# Altium PCB PCB1.PcbDoc
Units mil, origin at the board's own origin, x right, y up, seen from the top; angles counter-clockwise.
Board outline 4637 x 3446 mil, 2 copper layers (Top Layer, Bottom Layer), stack 23.712 mil thick; 43 components, 32 nets, 134 pads, 0 vias.
Unrouted connection lines stored in the file: 9.
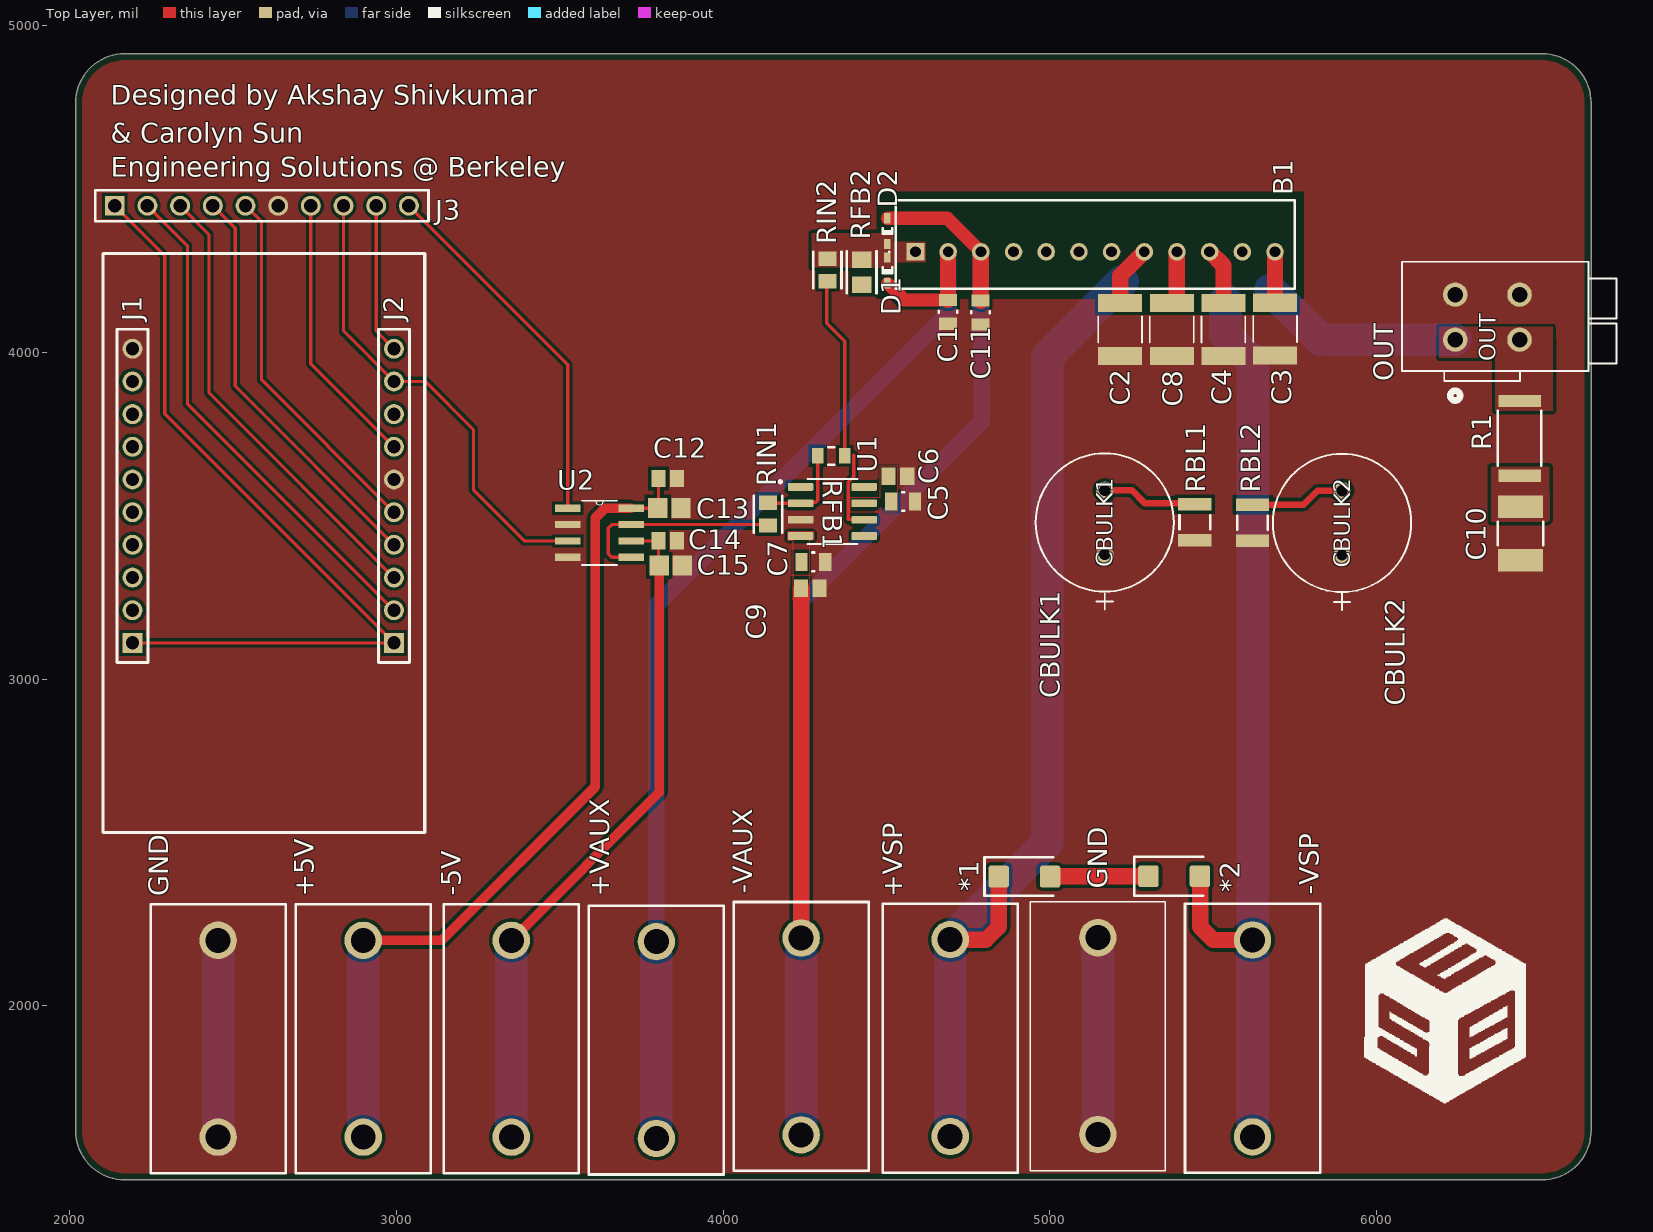
[diagram p0: Top Layer view]
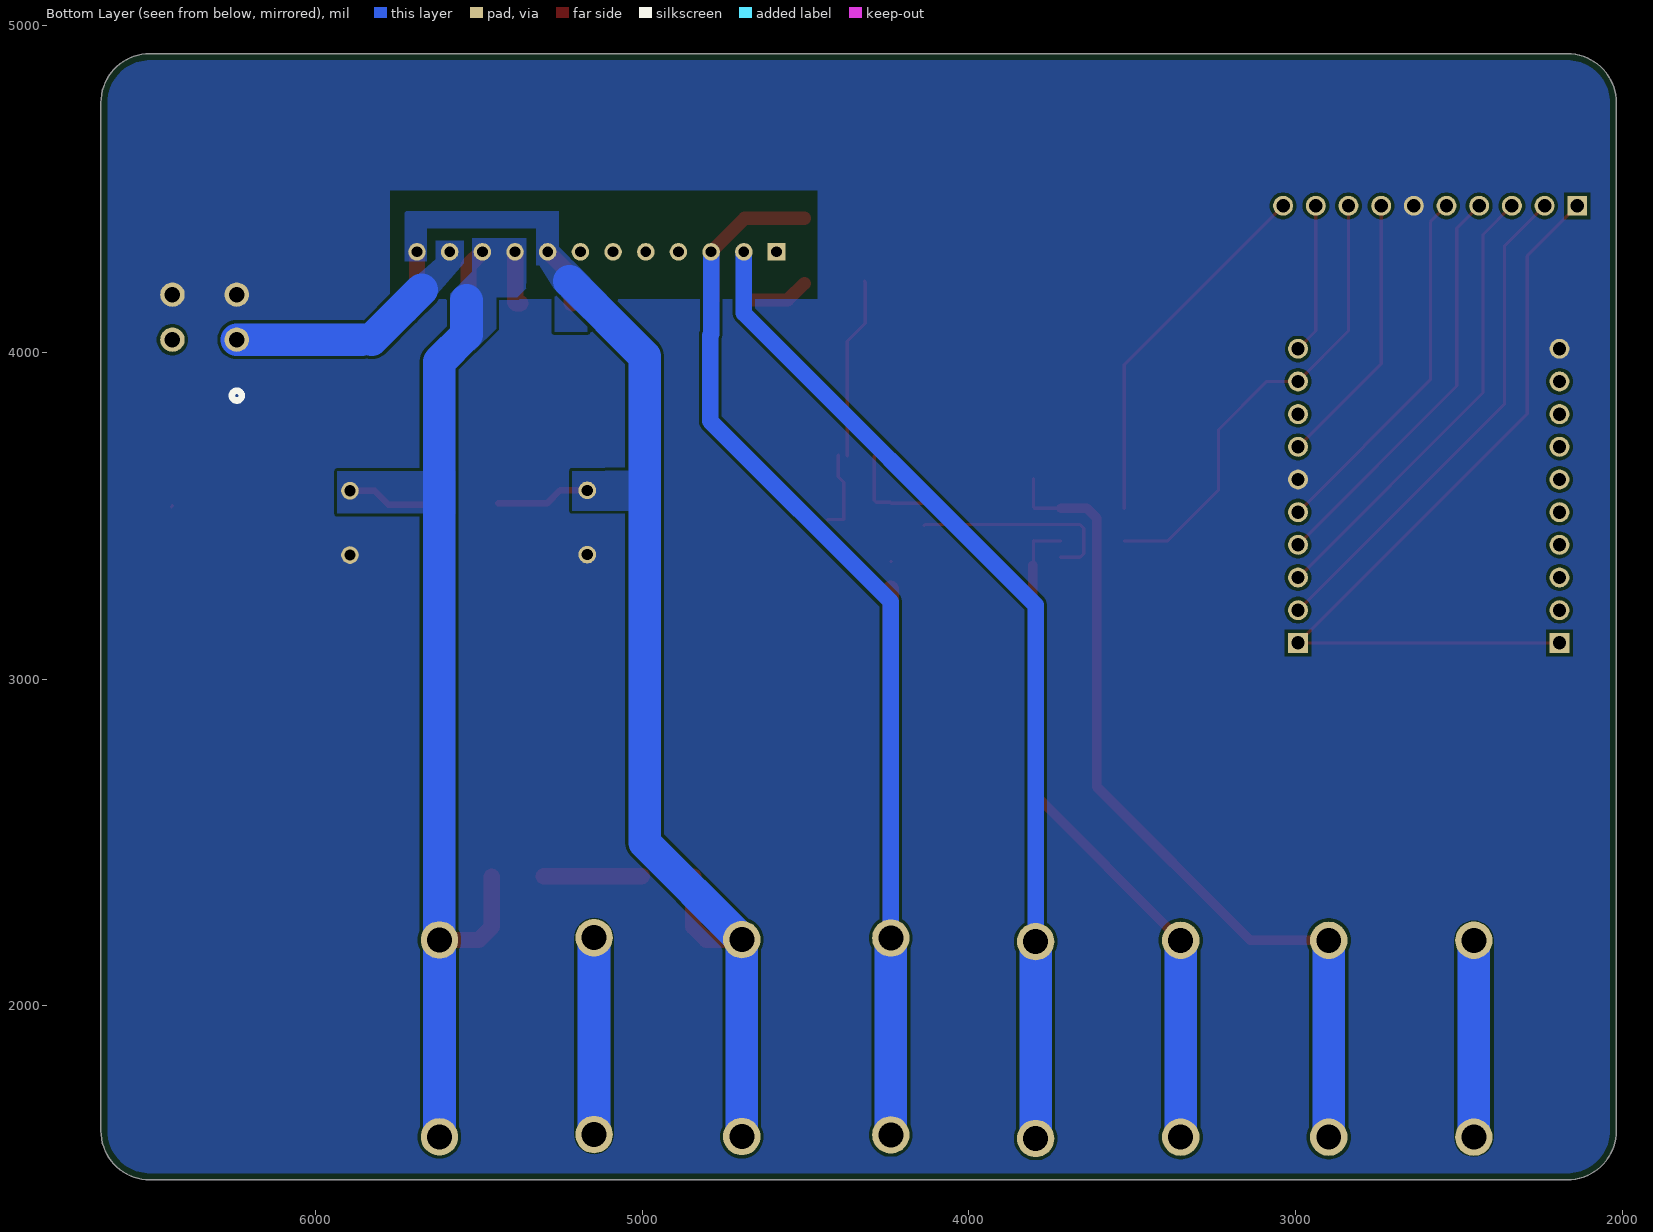
[diagram p1: Bottom Layer view, seen from below]
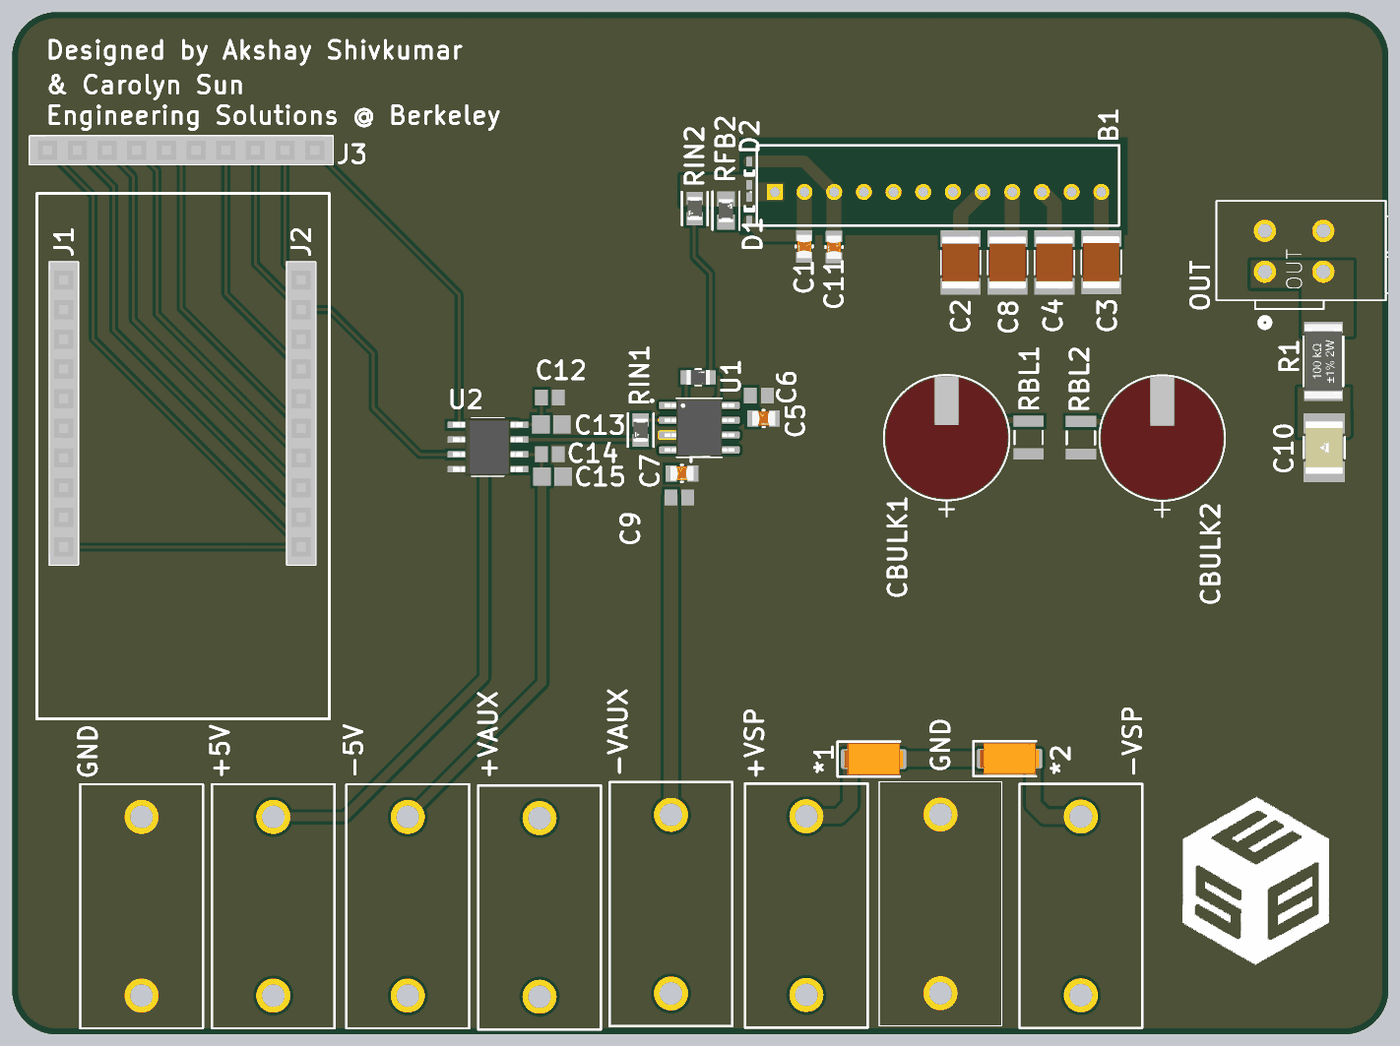
[diagram p2: 3D render of the assembled board from above, using the file's embedded part models]

## Layer stack, top to bottom
Top Solder: solder mask 0.4, Solder Resist, Dk 3.5
Top Layer: signal copper 2.756
Dielectric 2: prepreg 2.8, PP-006, Dk 4.1
Dielectric 1: dielectric 12.6, FR-4, Dk 4.8
Dielectric 3: prepreg 2.8, PP-006, Dk 4.1
Bottom Layer: signal copper 2.756
Bottom Solder: solder mask 0.4, Solder Resist, Dk 3.5

## Board outline
2019,1618 2019,4764 cw(c2169,4764) 2169,4914 6506,4914 cw(c6506,4764) 6656,4764 6656,1618 cw(c6506,1618) 6506,1468 2169,1468 cw(c2169,1618)

## Design rules (kind name [scope] priority, off if disabled: settings)
BoardOutlineClearance [All] p1: gap=20 ignorepadtopadclearanceinfootprint=FALSE
Clearance [All] p1: gap=10 ignorepadtopadclearanceinfootprint=TRUE except(20: Arc-Hole Track-Hole SMDPad-THPad SMDPad-Hole THPad-THPad THPad-Hole Via-Hole Fill-Hole Poly-Hole Region-Hole Text-Hole)
ComponentClearance [All] p1: gap=5 collisioncheckmode=3 verticalgap=5 showdistances=TRUE
Height [All] p1: minheight=0 maxheight=71497.94 prefheight=500
HoleSize HoleSize_Via [IsVia] p1: absolutevalues=TRUE maxlimit=60 minlimit=12 maxpercent=80.000 minpercent=20.000
HoleSize HoleSize_Pad [IsPad] p2: absolutevalues=TRUE maxlimit=200 minlimit=20 maxpercent=80.000 minpercent=20.000
HoleToHoleClearance [All] p1: gap=20 allowstackedmicrovias=TRUE
MinimumAnnularRing [All] p1: minimumring=6
PlaneConnect [All] p1: planeconnectstyle=Direct reliefexpansion=20 reliefentries=4 reliefconductorwidth=10 reliefairgap=10
PolygonConnect PolygonConnect_GND [All vs InNet('GND')] p1: connectstyle=Direct reliefconductorwidth=10 reliefentries=4 polygonreliefangle="90 Angle" airgapwidth=10
PolygonConnect [All] p2: connectstyle=Direct reliefconductorwidth=20 reliefentries=4 polygonreliefangle="90 Angle" airgapwidth=20
RoutingVias [All] p1: holewidth=14 width=28 viastyle="Through Hole" minholewidth=14 minwidth=28 maxholewidth=28 maxwidth=50
SilkToSilkClearance [All] p1: silktosilkclearance=6
SilkToSolderMaskClearance [IsPad] p1: minsilkscreentomaskgap=6 clearancetoexposedcopper=TRUE
SolderMaskExpansion [IsVia] p1: expansion=4 istentingtop=TRUE
SupplyNets "Schematic Supply Nets_6" [InNet('+15V')] p1: voltage=0.000
SupplyNets "Schematic Supply Nets_5" [InNet('+5V')] p2: voltage=0.000
SupplyNets "Schematic Supply Nets_4" [InNet('-15V')] p3: voltage=0.000
SupplyNets "Schematic Supply Nets_3" [InNet('-5V')] p4: voltage=0.000
SupplyNets "Schematic Supply Nets" [InNet('GND')] p5: voltage=0.000
UnRoutedNet [All] p1: checkbadconnections=TRUE
Width [All] p1: maxlimit=100 minlimit=6 preferedwidth=10 minimp=50.000000 maximp=50.000000 favimp=50.000000
Width Width_HV [All] p2: maxlimit=100 minlimit=20 preferedwidth=35 minimp=50.000000 maximp=50.000000 favimp=50.000000
22 further rules are at their usual default settings.

## Components (designator, comment, footprint, x,y, rotation, side; value= is the part's Value field where it differs from the comment)
*1 "US1M" DO-214AC_SMA 4922,2396 r0 top value=Diode
*2 "US1M" DO-214AC_SMA 5380,2397 r0 top value=Diode
+5V "571-0100" 571-0100 2899,1886 r270 top
+VAUX "571-0100" 571-0100 3796,1882.04 r270 top
+VSP "571-0100" 571-0100 4695,1888.04 r270 top
-5V "571-0100" 571-0100 3352,1886 r270 top
-VAUX "571-0100" 571-0100 4239,1893.04 r270 top
-VSP "571-0100" 571-0100 5620,1887.04 r270 top
B1 "PA107DP" PA107DP 4588.82,4307.78 r0 top
C1 "1uF" FP-CC0805-0_85-MFG 4688,4124 r270 top value="1 uF"
C2 "1uF" CAPC4532X279N 5215,4070 r90 top
C3 "1uF" CAPC4532X279N 5689,4071 r90 top
C4 "1uF" CAPC4532X279N 5531,4070 r90 top
C5 "2.2uF" FP-CC0805-0_85-MFG 4551,3544 r0 top value="2.2 uF"
C6 "10nF" CAPC2013X145X48LL20T23 4535,3621 r180 top
C7 "2.2uF" FP-CC0805-0_85-MFG 4276,3359 r0 top value="2.2 uF"
C8 "1uF" CAPC4532X279N 5373,4070 r90 top
C9 "10nF" CAPC2013X145X48LL20T23 4266.72,3277.66 r180 top
C10 "2.2nF" FP-HV1812-IPC_A 6440,3446 r270 top
C11 "1uF" FP-CC0805-0_85-MFG 4788,4122 r270 top value="1 uF"
C12 "100nF" CAPC2013X145X48LL20T23 3831,3614 r180 top
C13 "10uF" CAPC2013X140X50ML20T25 3836,3524 r180 top
C14 "100nF" CAPC2013X145X48LL20T23 3831,3424 r180 top
C15 "10uF" CAPC2013X140X50ML20T25 3840,3348 r180 top
CBULK1 "22uF" CAP_BX_10x16_RUB 5167.88,3381 r90 top
CBULK2 "22uF" CAP_BX_10x16_RUB 5894,3379.76 r90 top
D1 "1N4148WT" FAIR-SOD-523F-2_V 4503,4250.63 r90 top
D2 "1N4148WT" FAIR-SOD-523F-2_V 4503,4371 r90 top
GND "571-0100" 571-0100 2455,1886.04 r270 top (schematic designator GND2)
GND "571-0100" 5710100 5147,2209 r270 top (schematic designator GND1)
J1 "SSW-110-03-G-S" SMTC-SSW-110-03-X-S 2193,3111 r90 top
J2 "SSW-110-03-G-S" SMTC-SSW-110-03-X-S 2993,3111 r90 top
J3 "SSW-110-03-G-S" SMTC-SSW-110-03-X-S 2138.67,4448.51 r0 top
OUT "2601-1102" CONN2_2601-1102_WAG 6240.15,4039 r90 top
R1 "22R" FP-CRGP2512-IPC_C 6437,3737 r90 top value=22Ω
RBL1 "47k" RESC1210(3225)_L 5443.88,3480 r90 top value="47000.00 Ohm"
RBL2 "47k" RESC1210(3225)_L 5620,3478.88 r90 top value="47000.00 Ohm"
RFB1 "10k" FP-SR0805-MFG 4331,3683 r0 top value=10KΩ
RFB2 "20k" FP-CRCW0805-HPe3-IPC_A 4424,4245 r270 top
RIN1 "1k" FP-CRCW0805-HPe3-IPC_B 4137,3505 r90 top
RIN2 "1k" FP-CRCW0805-HPe3-IPC_B 4319,4252 r90 top
U1 "LM7171AIM" SOIC127P599X175-8N 4334.43,3513.2 r0 top
U2 "AD603ARZ-REEL-REEL7" SOIC127P600X175-8N 3622,3448 r0 top

## Footprints (in the part's own frame and the unit in brackets; to place one, negate y for a bottom-side part, rotate by r counter-clockwise, add the part's x,y. Pads: shape width x height; smd on the part's side, far side on the other; paste and mask are expansions set on the pad)
571-0100 [mm]
  round 2.91 hole 1.94: 1(-8,0) 2(7.3,0)
  silkscreen extent -10.8,-5.25 10.1,5.25
5710100 [mm]
  round 2.91 hole 1.94: 1(0,0) 2(15.3,0)
  silkscreen extent -2.8,-5.25 18.1,5.25
CAP_BX_10x16_RUB [mil]
  round 54 hole 34 paste-99999 mask+0: 1(0,0) 2(196.85,0)
  silkscreen extent -168,-212 310,212, body extent -108,-206 306,206, height 710
CAPC2013X140X50ML20T25 [mm] "Chip Capacitor, 2-Leads, Body 2.00x1.25mm, IPC Low Density"
  rect 1.5x1.55 smd: 1(-0.9,0) 2(0.9,0)
  body extent -1.1,-0.72 1.1,0.72, height 1.4
CAPC2013X145X48LL20T23 [mm] "Chip Capacitor, 2-Leads, Body 2.00x1.25mm, IPC High Density"
  rect 1.1x1.35 smd: 1(-0.725,0) 2(0.725,0)
  body extent -1.1,-0.72 1.1,0.72, height 1.45
CAPC4532X279N [mm]
  rect 1.41x3.42 smd: 1(-2.049,0) 2(2.049,0)
  silkscreen extent -1.02,-1.7 1.02,1.7, body extent -2.25,-1.6 2.25,1.6, height 2.79
CONN2_2601-1102_WAG [mm]
  round 1.9 hole 1.2 paste-2539.97 mask+0: 1(0,0) 2(0,-5) 3(3.5,0) 4(3.5,-5)
  silkscreen extent -4.74,-12.52 6.05,4.15
DO-214AC_SMA [mm]
  rrect25% 1.6x1.7 smd: 1(-2,0) 2(2,0)
  silkscreen extent -3.1,-1.5 2.25,1.5, body extent -2.53,-1.35 2.52,1.35, height 2.17
FAIR-SOD-523F-2_V [mm] "SMD, 2-Leads, Body 1.2x0.8mm, Height 0.7mm"
  rect 0.8x0.5 smd: 1(-1,0) 2(1,0)
  silkscreen extent -0.2,-0.38 0.24,0.38, body extent -0.6,-0.4 0.6,0.4, height 0.71
FP-CC0805-0_85-MFG [mm]
  rect 0.95x1.4 smd paste+0 mask+0: 1(-0.925,0) 2(0.925,0)
  silkscreen extent -0.08,-0.72 0.07,0.72, body extent -1.6,-1.05 1.6,1.05, height 0.25
FP-CRCW0805-HPe3-IPC_A [mil]
  rect 51.42x59.38 smd paste+0 mask+0: 1(-38.43,0) 2(38.43,0)
  silkscreen extent -64,-45 64,45, body extent -84,-49 84,49, height 10
FP-CRCW0805-HPe3-IPC_B [mil]
  rect 43.55x55.44 smd paste+0 mask+0: 1(-34.49,0) 2(34.49,0)
  silkscreen extent -56,-43 56,43, body extent -66,-38 66,38, height 10
FP-CRGP2512-IPC_C [mil]
  rect 37.72x130.17 smd paste+0 mask+0: 1(-114.25,0) 2(114.25,0)
  silkscreen extent -84,-67 84,67, body extent -137,-71 137,71, height 10
FP-HV1812-IPC_A [mil]
  rect 69.02x138.04 smd paste+0 mask+0: 1(-81.71,0) 2(81.71,0)
  silkscreen extent -35,-69 35,69, body extent -136,-89 136,89, height 10
FP-SR0805-MFG [mm]
  rect 0.9x1.2 smd paste+0 mask+0: 1(-1.05,0) 2(1.05,0)
  silkscreen extent -0.23,-0.67 0.23,0.67, body extent -1.6,-0.77 1.6,0.77, height 0.25
PA107DP [mm]
  rect 1.365x1.365 hole 0.84: 1(0,0)
  round 1.365 hole 0.84: 2(2.54,0) 3(5.08,0) 4(7.62,0) 5(10.16,0) 6(12.7,0) 7(15.24,0) 8(17.78,0) 9(20.32,0) 10(22.86,0) 11(25.4,0) 12(27.94,0)
  silkscreen extent -2.1,-2.87 29.47,3.99
RESC1210(3225)_L [mm] "Chip Resistor, Body 3.2x2.5mm, IPC High Density"
  rect 0.95x2.6 smd: 1(-1.4,0) 2(1.4,0)
  silkscreen extent -0.55,-1.2 0.55,1.2, body extent -1.7,-1.35 1.7,1.35, height 0.71
SMTC-SSW-110-03-X-S [mm] "SQ Post Socket, 1x10 Pins, Vertical, 2.54mm Pitch, Female"
  rect 1.55x1.55 hole 1.04: 1(0,0)
  round 1.55 hole 1.04: 2(2.54,0) 3(5.08,0) 4(7.62,0) 5(10.16,0) 6(12.7,0) 7(15.24,0) 8(17.78,0) 9(20.32,0) 10(22.86,0)
  silkscreen extent -1.52,-1.21 24.39,1.2, body extent -1.52,-1.21 24.38,1.21, height 8.51
SOIC127P599X175-8N [mm]
  rrect25% 1.97x0.6 smd paste+0 mask+0.102: 1(-2.47,1.905) 2(-2.47,0.635) 3(-2.47,-0.635) 4(-2.47,-1.905) 5(2.47,-1.905) 6(2.47,-0.635) 7(2.47,0.635) 8(2.47,1.905)
  silkscreen extent -4.14,-2.53 1.95,2.52, body extent -3,-2.45 3,2.45, height 1.75
SOIC127P600X175-8N [mil]
  rect 78x22 smd: 1(-97,75) 2(-97,25) 3(-97,-25) 4(-97,-75) 5(97,-75) 6(97,-25) 7(97,25) 8(97,75)
  silkscreen extent -54,-98 54,98, body extent -118,-96 118,96, height 69

## Part data
*1 *2: library part CMP-307-000068-2, "Diode 1000 V 1A Surface Mount DO-214AC (SMA)", Component Type=Standard, Datasheet=https://diotec.com/de/produktliste/D.html, Description_=Diode, Design Item ID=Diode, ki_keywords=Diode, Pin Count=2, Reference=D, Source=diode.SchLib
+5V +VAUX +VSP -5V -VAUX -VSP GND: library part CMP-416-000229-1, "Connector Receptacle, Female Sockets Board Edge, Through Hole, Right Angle Black I-Trac", Package=None, Check_prices=https://www.snapeda.com/parts/571-0100/Deltron/view-part/?ref=eda, Component Type=Standard, Design Item ID=571-0100, MF=Deltron, MP=571-0100, Pin Count=2, SnapEDA_Link=https://www.snapeda.com/parts/571-0100/Deltron/view-part/?ref=snap, Source=571-0100.SchLib
B1: library part CMP-162-000000-3, "PA107", Manufacturer_Name="Apex Microtechnology", Mouser Part Number=137-PA107DP, Datasheet Link=https://www.apexanalog.com/resources/products/pa107u.pdf, Design Item ID=PA107DP, Geometry.Height=22.73mm, Manufacturer_Part_Number=PA107DP, Mouser Price/Stock=https://www.mouser.co.uk/ProductDetail/Apex-Microtechnology/PA107DP?qs=TiOZkKH1s2QZuSYT1Lb%2FVw%3D%3D, Source=PA107DP.SchLib
C1 C11: library part CMP-2100-03605-2, "CAP CER 1UF 25V X7R 0805", Capacitance="1 uF", Manufacturer=Yageo, Manufacturer Part Number=CC0805KKX7R8BB105, Package=CC0805-0.85, Temperature="-30°C to +85°C", Temperature Characteristic=X7R, Temperature Range High=+85°C, Temperature Range Low=-30°C, Tolerance=0.1, Voltage Rating="25 V", Automotive=No, Category=Cap, ComponentLink2Description=Datasheet, ComponentLink2URL=http://www.yageo.com/documents/recent/UPY-GPHC_Y5V_6.3V-to-50V_8.pdf, Device Class L1="Passive Components", Device Class L2=Capacitors, Device Class L3="Ceramic Capacitors", Digikey Description="CAP CER 1UF 25V X7R 0805", Footprint Url=http://www.yageo.com/exep/pages/download/literatures/UPY-C_GEN_24.pdf, Height=0.95mm, Ipc Land Pattern Name=CAPC200125X85, Lead Free=Yes, Material=Ceramic, Mouser Description="Multilayer Ceramic Capacitor, CC Series, 1 - F, - 10%, X7R, 25 V, 0805 [2012 Metric]", Octopart=https://octopart.com/cc0805kkx7r8bb105-yageo-42244645, RoHS=TRUE
C2 C3 C4 C8: library part CMP-292-000450-2, "1 ÂµF Â±10% 200V Ceramic Capacitor X7R 1812 (4532 Metric)", Package="4532 AVX", Check_prices=https://www.snapeda.com/parts/18122C105KAT2A/AVX/view-part/?ref=eda, Component Type=Standard, Design Item ID=18122C105KAT2A, MF=AVX, MP=18122C105KAT2A, Pin Count=2, SnapEDA_Link=https://www.snapeda.com/parts/18122C105KAT2A/AVX/view-part/?ref=snap, Source=18122C105KAT2A.SchLib
C5 C7: library part CMP-03422-001390-1, "CAP CER 2.2UF 50V X7R 0805", Capacitance="2.2 uF", Manufacturer=Yageo, Manufacturer Part Number=CC0805KKX7R9BB225, Package=CC0805-0.85, Temperature="-30°C to +85°C", Temperature Characteristic=X7R, Temperature Range High=+85°C, Temperature Range Low=-30°C, Tolerance=0.1, Voltage Rating="50 V", Automotive=No, Category=Cap, ComponentLink2Description=Datasheet, ComponentLink2URL=http://www.yageo.com/documents/recent/UPY-GPHC_Y5V_6.3V-to-50V_8.pdf, Device Class L1="Passive Components", Device Class L2=Capacitors, Device Class L3="Ceramic Capacitors", Digikey Description="CAP CER 2.2UF 50V X7R 0805", Footprint Url=http://www.yageo.com/exep/pages/download/literatures/UPY-C_GEN_24.pdf, Height=0.95mm, Ipc Land Pattern Name=CAPC200125X85, Lead Free=Yes, Material=Ceramic, Mouser Description="0805 50 V 2.2 uF ±10% Tolerance X7R Multilayer Ceramic Capacitor", Octopart=https://octopart.com/cc0805kkx7r9bb225-yageo-51849248, RoHS=TRUE
C6 C9: library part CMP-2007-03159-1, "10000 pF ±10% 50V Ceramic Capacitor X7R 0805 (2012 Metric)", Manufacturer=Vitramon, Part Number=VJ0805Y103KXAMP
C10: library part CMP-00030-71705866-1, "HV1812Y222KXHATHV Multilayer Ceramic Capacitor, 2200 pF, 3000 V, ± 10%, X7R, 1812 [4532 Metric]", Case Code (Imperial)=1812, Case Code (Metric)=4532, Dielectric=X7R, Max Operating Temperature=125°C, Min Operating Temperature=-55°C, Tolerance=10%, Voltage Rating=3kV, Capacitance=2.2nF, Case/Package=1812, Length=4.4958mm, Mount="Surface Mount", NexarPartId=71705866, Packaging="Cut Tape", REACH SVHC="No SVHC", RoHS=Compliant, Schedule B="8532240020, 8532240020", Thickness=2.6924mm, Voltage Rating (DC)=3kV, Width=3.2004mm
C12 C14: library part CMP-2007-01796-1, Manufacturer=Vitramon, Part Number=VJ0805Y104MXAMT
C13 C15: library part CMP-2007-04702-1, Manufacturer="AVX Interconnect / Elco", Part Number=0805ZC106KAT2A
CBULK1 CBULK2: library part CMP-292-000454-1, "No Description Available", Manufacturer_Name=Rubycon, Manufacturer_Part_Number=250BXC22MEFCT810X16, Copyright="Copyright (C) 2026 Ultra Librarian. All rights reserved.", Design Item ID=250BXC22MEFCT810X16, Source=250BXC22MEFCT810X16.SchLib
D1 D2: library part CMP-0881-00001-1, "High Conductance Fast Switching Diode, 75 V, -55 to 150 degC, 2-Pin SOD523F, RoHS", Manufacturer="Fairchild Semiconductor", Temperature Range="-55 to 150 degC", BVR (IR="5 uA)=75 V Min.", CO="4 pF Max.", ComponentLink1Description="Manufacturer URL", ComponentLink1URL=http://www.fairchildsemi.com/, ComponentLink2Description=Datasheet, ComponentLink2URL=http://www.fairchildsemi.com/ds/1N/1N4148WT.pdf, DatasheetVersion="Rev. A2", IR (VR="75 V)=5 uA Max.", Mounting Technology="Surface Mount", PackageDescription="2-Pin Surface Mount Device, Body 1.2 x 0.8 mm, Height 0.7 mm", PackageReference=SOD-523F-2, PartNumber=1N4148WT, RoHS=TRUE, VF="1 V Max."
GND: library part CMP-165-000000-1, "Test Sockets SINGLE PCB SOCK BLK", Manufacturer_Name="DELTRON COMPONENTS", Mouser Part Number=164-6218, Datasheet Link=https://www.dem-uk.com/deltron-components/Data/Product_Downloads/deltron-571-0100-4mm-90deg-single-socket-data.pdf, Design Item ID=571-0100, Geometry.Height=12.4mm, Manufacturer_Part_Number=571-0100, Mouser Price/Stock=https://www.mouser.co.uk/ProductDetail/Deltron/571-0100?qs=E2gf03EXmtoqC8%2FBhoPdrg%3D%3D, Source=571-0100.SchLib
J1 J2 J3: library part CMP-1023-00394-1, "SQ Post Socket, Through-hole, Vertical, -55 to 125 degC, 2.54 mm Pitch, 10-Pin, Female, RoHS", Manufacturer=Samtec, Temperature Range="-55 to 125 degC", ComponentLink1Description="Manufacturer URL", ComponentLink1URL=http://www.samtec.com, ComponentLink2Description=Datasheet, ComponentLink2URL=http://www.samtec.com/documents/webfiles/pdf/SSW_TH.PDF, ComponentLink3Description="Package Specification", ComponentLink3URL=http://www.samtec.com/documents/webfiles/cpdf/SSW-1XX-XX-XXX-X-XX-XXX-XX-MKT.pdf, DatasheetVersion=F-214, Mounting Technology=Through-hole, Orientation=Vertical, PackageDescription="Assembly, Socket Strip .016 X .031 Tail", PackageReference=SSW-110-03-X-S, PackageVersion="CA, 6/1987", PartNumber=SSW-110-03-G-S, Pitch="2.54 mm", RoHS=True
OUT: library part CMP-1234-000000-4, "Description", Manufacturer_Name=Wago, Copyright="Copyright (C) 2026 Ultra Librarian. All rights reserved.", Design Item ID=2601-1102, Manufacturer_Part_Number=2601-1102, RefDes=RefDes, Source=2601-1102.SchLib, Type=Type
R1: library part CMP-03211-002108-1, "CRGP2512 22Ω 2W ±100ppm/°C 1% 500V", Ambient Temperature Range High=+70°C, Manufacturer=TE, Manufacturer Part Number=CRGP2512F22R, Package=CRGP2512, Power Rating=2W, Resistance=22Ω, Temperature="-55°C to +155°C", Temperature Coefficient=±100ppm/°C, Temperature Range High=+155°C, Temperature Range Low=-55°C, Tolerance=0.01, Voltage Rating=500V, Automotive=No, Category=Res, ComponentLink2Description=Datasheet, ComponentLink2URL=https://www.mouser.ca/datasheet/2/418/NG_DS_9-1773463-9_A-1358566.pdf, Composition="Thick Film", Device Class L1="Passive Components", Device Class L2=Resistors, Device Class L3="Chip SMD Resistors", Height=0.65mm, Ipc Land Pattern Name=RESC635320X55, Lead Free=Yes, Octopart=https://octopart.com/crgp2512f22r-te+connectivity-91019048, RoHS=TRUE, Series=CRGP
RBL1 RBL2: library part CMP-1015-00114-1, "47K 0.5W 5% 1210 (3225 Metric)  SMD", Case-EIA=1210, Case-Metric=3225, Power="0.5 W", Tolerance="5 %", Technology=SMT
RFB1: library part CMP-03412-005404-1, "RES SMD 0805 1/2W 1% 10K OHM", Manufacturer=Yageo, Manufacturer Part Number=SR0805FR-4710KL, Package=SR0805, Power Rating=0.5W, Resistance=10KΩ, Temperature="-55°C to +155°C", Temperature Range High=+155°C, Temperature Range Low=-55°C, Tolerance=0.01, Voltage Rating=150V, Automotive=Yes, Automotive Grade="Grade 0", Category=Res, ComponentLink2Description=Datasheet, ComponentLink2URL=http://www.yageo.com/documents/recent/PYu-SR_D_F%20tol_RoHS_L_3.pdf, Composition="Thick Film", Device Class L1="Passive Components", Device Class L2=Resistors, Device Class L3="Chip SMD Resistors", Digikey Description="RES SMD 0805 1/2W 1% 10K OHM", Footprint Url=http://www.yageo.com/exep/pages/download/literatures/PYu-R_Mount_10.pdf, Height=0.6mm, Ipc Land Pattern Name=RESC200125X50, Lead Free=Yes, Octopart=https://octopart.com/sr0805fr-4710kl-yageo-91478094, RoHS=TRUE, Series=SR
RFB2: library part CMP-02407-003063-1, "RES Thick Film, 20kΩ, 1%, 0.5W, 100ppm/°C, 0805", Case Code (Imperial)=0805, Case Code (Metric)=2012, Max Operating Temperature=155°C, Max Power Dissipation=333mW, Min Operating Temperature=-55°C, Package Quantity=10, Power Rating=500mW, Resistance=20kR, Temperature Coefficient=100ppm/°C, Tolerance=1%, Voltage Rating=150V, Case/Package=0805, Composition="Thick Film", Contact Plating=Tin, Depth=1.25mm, Features="Automotive AEC-Q200", Height=0.024inch, Lead Free="Lead Free", Length=2mm, Mount="Surface Mount", Number of Terminations=2, Packaging="Tape and Reel", Radiation Hardening=No, Termination=SMD/SMT, Weight=0.000194oz, Width=1.2mm
RIN1 RIN2: library part CMP-02407-008945-1, "RES Thick Film, 1kΩ, 5%, 0.5W, 200ppm/°C, 0805", Case Code (Imperial)=0805, Case Code (Metric)=2012, Max Operating Temperature=155°C, Max Power Dissipation=333mW, Min Operating Temperature=-55°C, Package Quantity=1, Power Rating=500mW, Resistance=1kR, Temperature Coefficient=200ppm/°C, Tolerance=5%, Voltage Rating=150V, Case/Package=0805, Composition="Thick Film", Contact Plating=Tin, Features="Automotive AEC-Q200", Height=0.024inch, Lead Free="Lead Free", Length=0.079inch, Number of Terminations=2, Packaging="Tape and Reel", Radiation Hardening=No, Termination=SMD/SMT, Weight=0.000194oz, Width=0.049inch
U1: library part CMP-399-000036-4, "Very High Speed, High Output Current, Voltage Feedback Amplifier", Package="SOIC-8 Texas Instruments", Check_prices=https://www.snapeda.com/parts/LM7171AIMX/NOPB/Texas+Instruments/view-part/?ref=eda, Component Type=Standard, Design Item ID=LM7171AIM, MF="Texas Instruments", MP=LM7171AIMX/NOPB, Pin Count=5, SnapEDA_Link=https://www.snapeda.com/parts/LM7171AIMX/NOPB/Texas+Instruments/view-part/?ref=snap, Source=LM7171AIM.SchLib
U2: library part CMP-399-000037-2, "Low Noise, 90 MHz Variable Gain Amplifier", Package="SOIC-8 Analog Devices", Check_prices=https://www.snapeda.com/parts/AD603ARZ-REEL7/Analog+Devices/view-part/?ref=eda, Component Type=Standard, Design Item ID=AD603ARZ-REEL-REEL7, MF="Analog Devices", MP=AD603ARZ-REEL7, Pin Count=8, SnapEDA_Link=https://www.snapeda.com/parts/AD603ARZ-REEL7/Analog+Devices/view-part/?ref=snap, Source=AD603ARZ-REEL-REEL7.SchLib

## Nets (pads, with @x,y where several pads share a name; then routed paths per layer and width w, separated by ;. In a path a pad name is that pad's centre, name@x,y a point inside that pad or via, vN(x,y) a via of type N, cw(c..) or ccw(c..) an arc to the next point about the centre after c; other vN are vias at no path point)
+5V: +5V.1 +5V.2 C12.2 C13.2 U2.8 | length 2624.3
  Top Layer w10: U2.8 3799.57,3523 C13.2 3802.46,3525.89 C12.2
  Top Layer w30: +5V.1 3138.96,2200.96 3608.84,2670.84 3608.84,3493 3638.84,3523 U2.8
  Bottom Layer w100: +5V.2 +5V.1
+15V: +VAUX.1 +VAUX.2 B1.2 C1.1 C5.1 C6.2 D1.1 U1.7 | length 3436.7
  Top Layer w40: D1.1 4553.84,4160.42 C1.1
  Top Layer w50: C1.1 4688.41,4160.83 4688.41,4307.37 B1.2
  Bottom Layer w10: 3796,3227 3799.13,3230.13
  Bottom Layer w50: +VAUX.1 3796,3227 ; 3799.13,3230.13 4688.82,4119.82 B1.2
  Bottom Layer w100: +VAUX.2 +VAUX.1
-5V: -5V.1 -5V.2 C14.2 C15.2 U2.6 | length 2097.6
  Top Layer w10: U2.6 3801.46,3423 C14.2 3802.46,3350.11 C15.2
  Top Layer w30: -5V.1 3804.57,2653.53 C15.2
  Bottom Layer w100: -5V.2 -5V.1
-15V: -VAUX.1 -VAUX.2 B1.3 C7.1 C9.2 C11.1 D2.2 U1.4 | length 4480.5
  Top Layer w10: C9.2 C9.2@4239,3276.83
  Top Layer w40: D2.2 4686.23,4410.37 B1.3
  Top Layer w50: -VAUX.1 C9.2@4239,3276.83 ; C11.1 4788.41,4158.83 4788.41,4307.37 B1.3
  Bottom Layer w10: 4239,3237 4241.13,3239.13
  Bottom Layer w50: -VAUX.1 4239,3237 ; 4241.13,3239.13 4792,3790 4792,4052.29 4788.82,4055.48 B1.3
  Bottom Layer w100: -VAUX.2 -VAUX.1
D0: J1.2
D1: J1.3
D2: J1.4
D3: J1.5
D4: J1.6
D5: J1.7
D6: J1.8
D7: J1.9
DATA: J2.4 J3.4 | length 1267.1
  Top Layer w10: J3.4 2507,4380.18 2507,3897 J2.4
FU_UD: J2.3 J3.3 | length 1408.5
  Top Layer w10: J3.3 2427,4360.18 2427,3877 J2.3
GND: B1.4 C1.2 C2.1 C3.1 C4.1 C5.2 C6.1 C7.2 C8.1 C9.1 C10.2 C11.2 C12.1 C13.1 C14.1 C15.1 CBULK1.1 CBULK2.1 GND.1 GND.2 J1.10 J2.6 J3.6 OUT.3 OUT.4 RBL1.1 RBL2.1 U1.3 U2.2 U2.4 | length 1204.7
  Bottom Layer w100: GND.2@2455,1598.64 GND.1@2455,2201 ; GND.2@5147,1606.64 GND.1@5147,2209
Net*1_1: *1.1 +VSP.1 +VSP.2 B1.8 B1.12 C2.2 C3.2 CBULK1.2 RBL1.2 | length 3795.2
  Top Layer w10: RBL1.2@5440,3539 RBL1.2
  Top Layer w20: CBULK1.2 5251.03,3577.85 5289.88,3539 RBL1.2@5440,3539
  Top Layer w40: B1.12@5688.82,4304.06 B1.12
  Top Layer w50: +VSP.1 4804,2203 4843.26,2242.26 *1.1 ; C2.2 5215,4233.97 B1.8 ; B1.12 5688.91,4307.69 5688.91,4151.76 C3.2
  Bottom Layer w100: +VSP.2 +VSP.1 4992.39,2500.39 4992.39,3988.39 5222,4218
Net*1_2: *1.2 *2.1 | length 300.9
  Top Layer w10: *1.2 *1.2@5001.24,2396.5 ; *2.1@5300.76,2396.5 *2.1
  Top Layer w50: *1.2@5001.24,2396.5 *2.1@5300.76,2396.5
Net*2_2: *2.2 -VSP.1 -VSP.2 B1.9 B1.10 C4.2 C8.2 CBULK2.2 RBL2.2 | length 3576.7
  Top Layer w10: *2.2 *2.2@5460,2395.74
  Top Layer w20: RBL2.2 5776.24,3534 5818.85,3576.61 CBULK2.2
  Top Layer w50: C8.2 5385.34,4150.67 5388.1,4153.43 5388.1,4307.07 B1.9 ; *2.2@5460,2395.74 5460,2242 5500,2202 -VSP.1 ; B1.10 5531,4265.6 C4.2
  Bottom Layer w10: 5537,4159 5537.31,4158.69 ; 5621,3971 5628.31,3963.69
  Bottom Layer w100: 5537.31,4158.69 5537.31,4054.69 5621,3971 -VSP.1@5621,2203 ; -VSP.2 -VSP.1@5620,2205.94
NetB1_1: B1.1 D1.2 D2.1 RFB2.1 RIN2.2
NetB1_11: B1.11 OUT.1 OUT.2 R1.2 RFB2.2 | length 629.5
  Bottom Layer w10: 5827,4039 5857.6,4039
  Bottom Layer w100: 5674,4192 5827,4039 ; 5857.6,4039 OUT.1
NetC10_1: C10.1 R1.1 | length 4.2
  Top Layer w10: C10.1@6437,3530.71 C10.1
NetJ3_10: J3.10 U2.1 | length 1127
  Top Layer w10: J3.10 3525,3962.18 U2.1
NetRFB1_1: RFB1.1 RIN1.2 U1.2 | length 544.8
  Top Layer w10: RIN1.2 4138.3,3538.2 U1.2 4240.65,3541.66 4283.8,3541.66 4289.66,3547.51 RFB1.1 ; 4400.06,3685.05 4400.06,3619.58 4382.9,3602.42 4382.9,3489.1 4383.76,3488.24 4431.63,3488.24 4431.68,3488.2
NetRFB1_2: RFB1.2 RIN2.1 U1.6 | length 558.3
  Top Layer w10: RIN2.1 4317,4215.51 4317,4089 4372.34,4033.66 RFB1.2
NetRIN1_1: RIN1.1 U2.5 U2.7 | length 646.1
  Top Layer w10: U2.5 3660,3373 3649,3384 3649,3462 3660,3473 U2.7 4134.51,3473 RIN1.1
QOUT1: J2.7 J3.7 | length 842.9
  Top Layer w10: J3.7 2738.67,3965.33 J2.7
QOUT2: J2.8
RST: J2.5 J3.5 | length 1125.7
  Top Layer w10: J3.5 2588,4399.18 2588,3916 J2.5
VCC: J1.1 J2.1 J3.1 | length 2491.4
  Top Layer w10: J3.1 2292,4295.18 2292,3812 J2.1 J1.1
W_CLK: J2.2 J3.2 | length 1550
  Top Layer w10: J3.2 2361,4326.18 2361,3843 J2.2
ZOUT1: J2.9 J3.8 U2.3 | length 1443.9
  Top Layer w10: J3.8 2838.67,4065.33 J2.9 3089,3911 3236,3764 3236,3579 3392,3423 U2.3
ZOUT2: J2.10 J3.9 | length 460
  Top Layer w10: J3.9 2938.67,4065.33 J2.10
pads on no net: B1.5 B1.6 B1.7 U1.1 U1.5 U1.8
copper on no net: | length 2
  Top Layer w10: 4237.19,3360.39 4238.58,3359

## Polygon pours and split planes (outlines as drawn)
Net*2_2 on Bottom Layer "NET*2_2_L02_P000" (solid, pour order 0): 5571,3636 5571,3507 5933,3507 5933,3635 5934,3636 5833,3636
Net*1_1 on Bottom Layer "NET*1_1_L02_P012" (solid, pour order 12): 5213.5,3637.8 4943,3637.8 4943,3515.8 5213.5,3515.8 5213.5,3636.8 5112.5,3636.8
Net*1_1 on Bottom Layer "NET*1_1_L02_P003" (solid, pour order 3): 5321,4277 5270.5,4195.5 5226,4151 5179,4104 5107.5,4175.5 5278,4346 5321,4346 5321,4340 5323,4342 5321,4340
Net*2_2 on Bottom Layer "NET*2_2_L02_P010" (solid, pour order 10): 5587,4072 5587,4180 5488,4279 5356,4279 5356,4197 5355,4196 5382,4169 5447,4169 5447,4073 5514,4006 5583,4075 5583,4077
GND on Bottom Layer "GND_L02_P026" (solid, pour order 26): 1054.5,4005 1067.5,3992 4462.5,3992 4462.5,4496 5771.5,4496 5771.5,3980 9278.5,3980 9278.5,5025 1066.08,5025
GND on Bottom Layer "GND_L02_P025" (solid, pour order 25): 1784,1419.97 7190.72,1419.97 7173,3089.97 7173,4162 1784,4162
no net on Bottom Layer "NONET_L02_P017" (solid, pour order 17): 5168,4063 5168,4236 5278,4346 5321,4346 5321,4298 5268,4245 5268,4063
NetB1_11 on Bottom Layer "NetB1_11" (solid, pour order 24): 5632,4342 5545,4342 5545,4273 5699.57,4094.43 5769.57,4164.43 5632,4284.99
Net*1_1 on Bottom Layer "NET*1_1_L02_P020" (solid, pour order 20): 5256,4266 5255,4265 5324,4266 5324,4379 5325,4380 5659,4380 5659,4279 5727,4279 5727,4427 5722,4432 5255,4432 5255,4267
Net*2_2 on Bottom Layer "NET*2_2_L02_P016" (solid, pour order 16): 5519,4348.5 5519,4211 5355,4211 5355,4244.45 5355,4348.5
GND on Top Layer "GND_L01_P023" (solid, pour order 23): 4469,4046.9 4469,4493 5778,4493 5778,4043 9252,4043 9252,4930 9256,4934 908,4934 908,4030
GND on Top Layer "GND_L01_P022" (solid, pour order 22): 7638,4162 7638,1419 1891,1419 1891,4162
no net on Top Layer "NONET_L01_P008" (solid, pour order 8): 4535,3651 4534,3652 4480,3652 4480,3555 4388,3555 4388,3512 4535,3512 4535,3652
no net on Top Layer "NONET_L01_P013" (solid, pour order 13): 4215.2,3423.18 4197.2,3423.18 4197.2,3453.18 4277.2,3453.18 4277.2,3426.18 4276.2,3425.18 4263.2,3425.18 4263.2,3243.18 4213.2,3243.18 4257.2,3243.18 4215.2,3243.18
NetC10_1 on Top Layer "NETC10_1_L01_P014" (solid, pour order 14): 6527.92,3650.11 6350.92,3650.11 6349.92,3651.11 6349.92,3481.11 6527.92,3481.11 6528.92,3480.11
NetB1_11 on Top Layer "NETB1_11_L01_P015" (solid, pour order 15): 6539,4079 6538,4078 6192,4078 6192,3984 6363,3984 6363,3821 6539,3821
NetB1_1 on Top Layer "NETB1_1_L01_P021" (solid, pour order 21): 4621,4339 4520,4339 4520,4365 4521,4366 4271,4364.95 4271,4260.17 4485,4258 4525,4258 4525,4276 4620,4276 4620,4338

## Silkscreen, mask and mechanical layers (free items; w line width, h text height)
Top Overlay:
  drawing of 7 lines, arcs and shapes, not listed
  text "Designed by Akshay Shivkumar" at 2127,4758 h60
  text "& Carolyn Sun" at 2127,4641 h60
  text "Engineering Solutions @ Berkeley" at 2127,4538 h60
Mechanical 1:
  the board outline again, w10